# Altium PCB rfıd door lock.PcbDoc
Units mm, origin at the board's own origin, x right, y up, seen from the top; angles counter-clockwise.
Board outline 100 x 100 mm, 2 copper layers (Top Layer, Bottom Layer); 9 components, 16 nets, 59 pads, 4 vias.
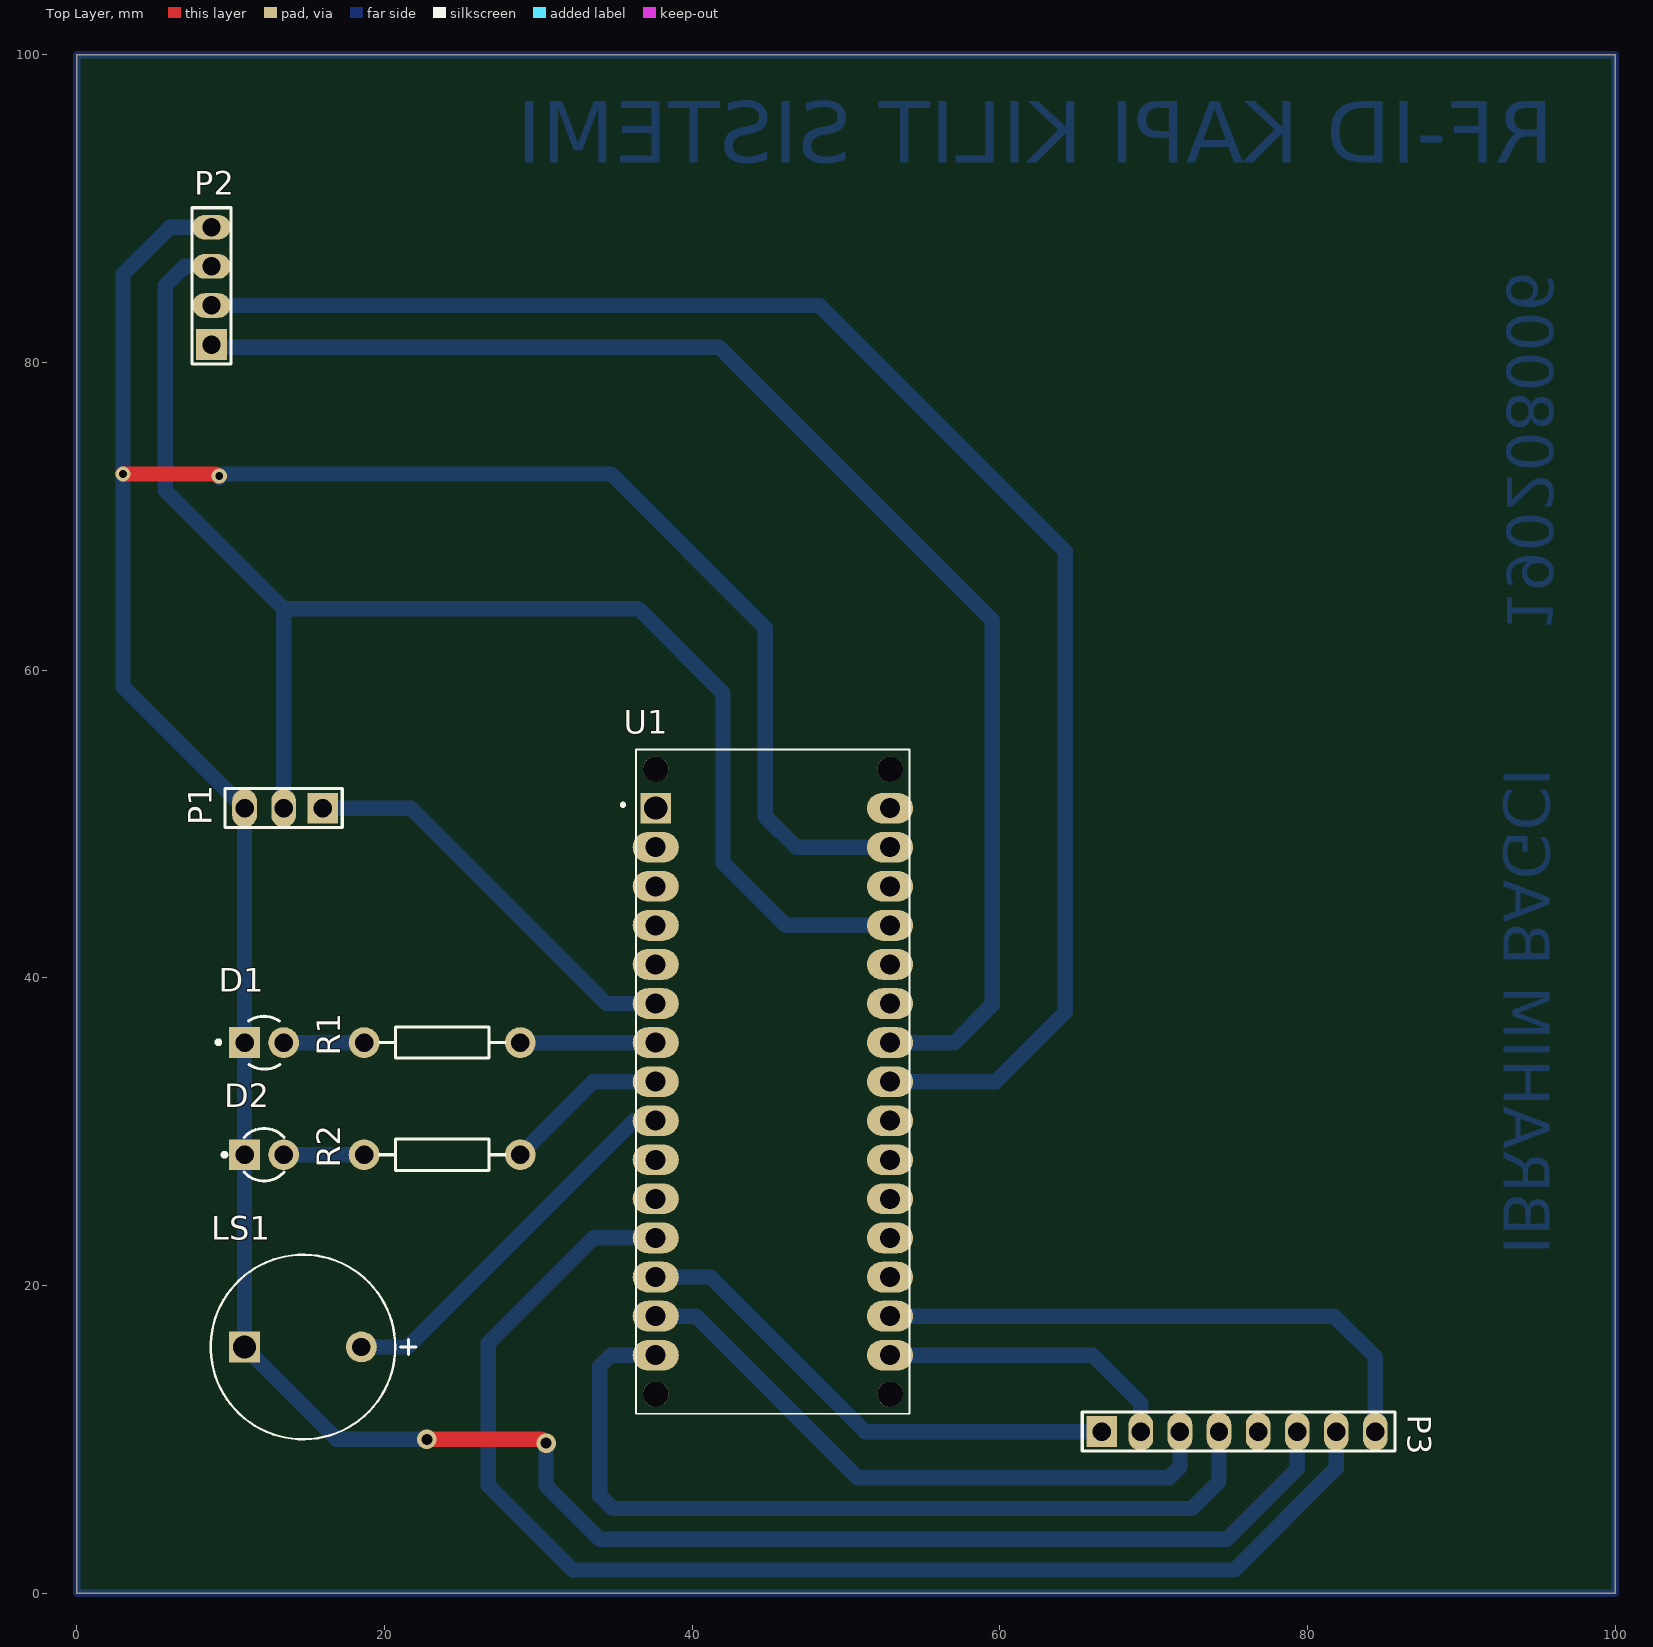
[diagram p0: Top Layer view]
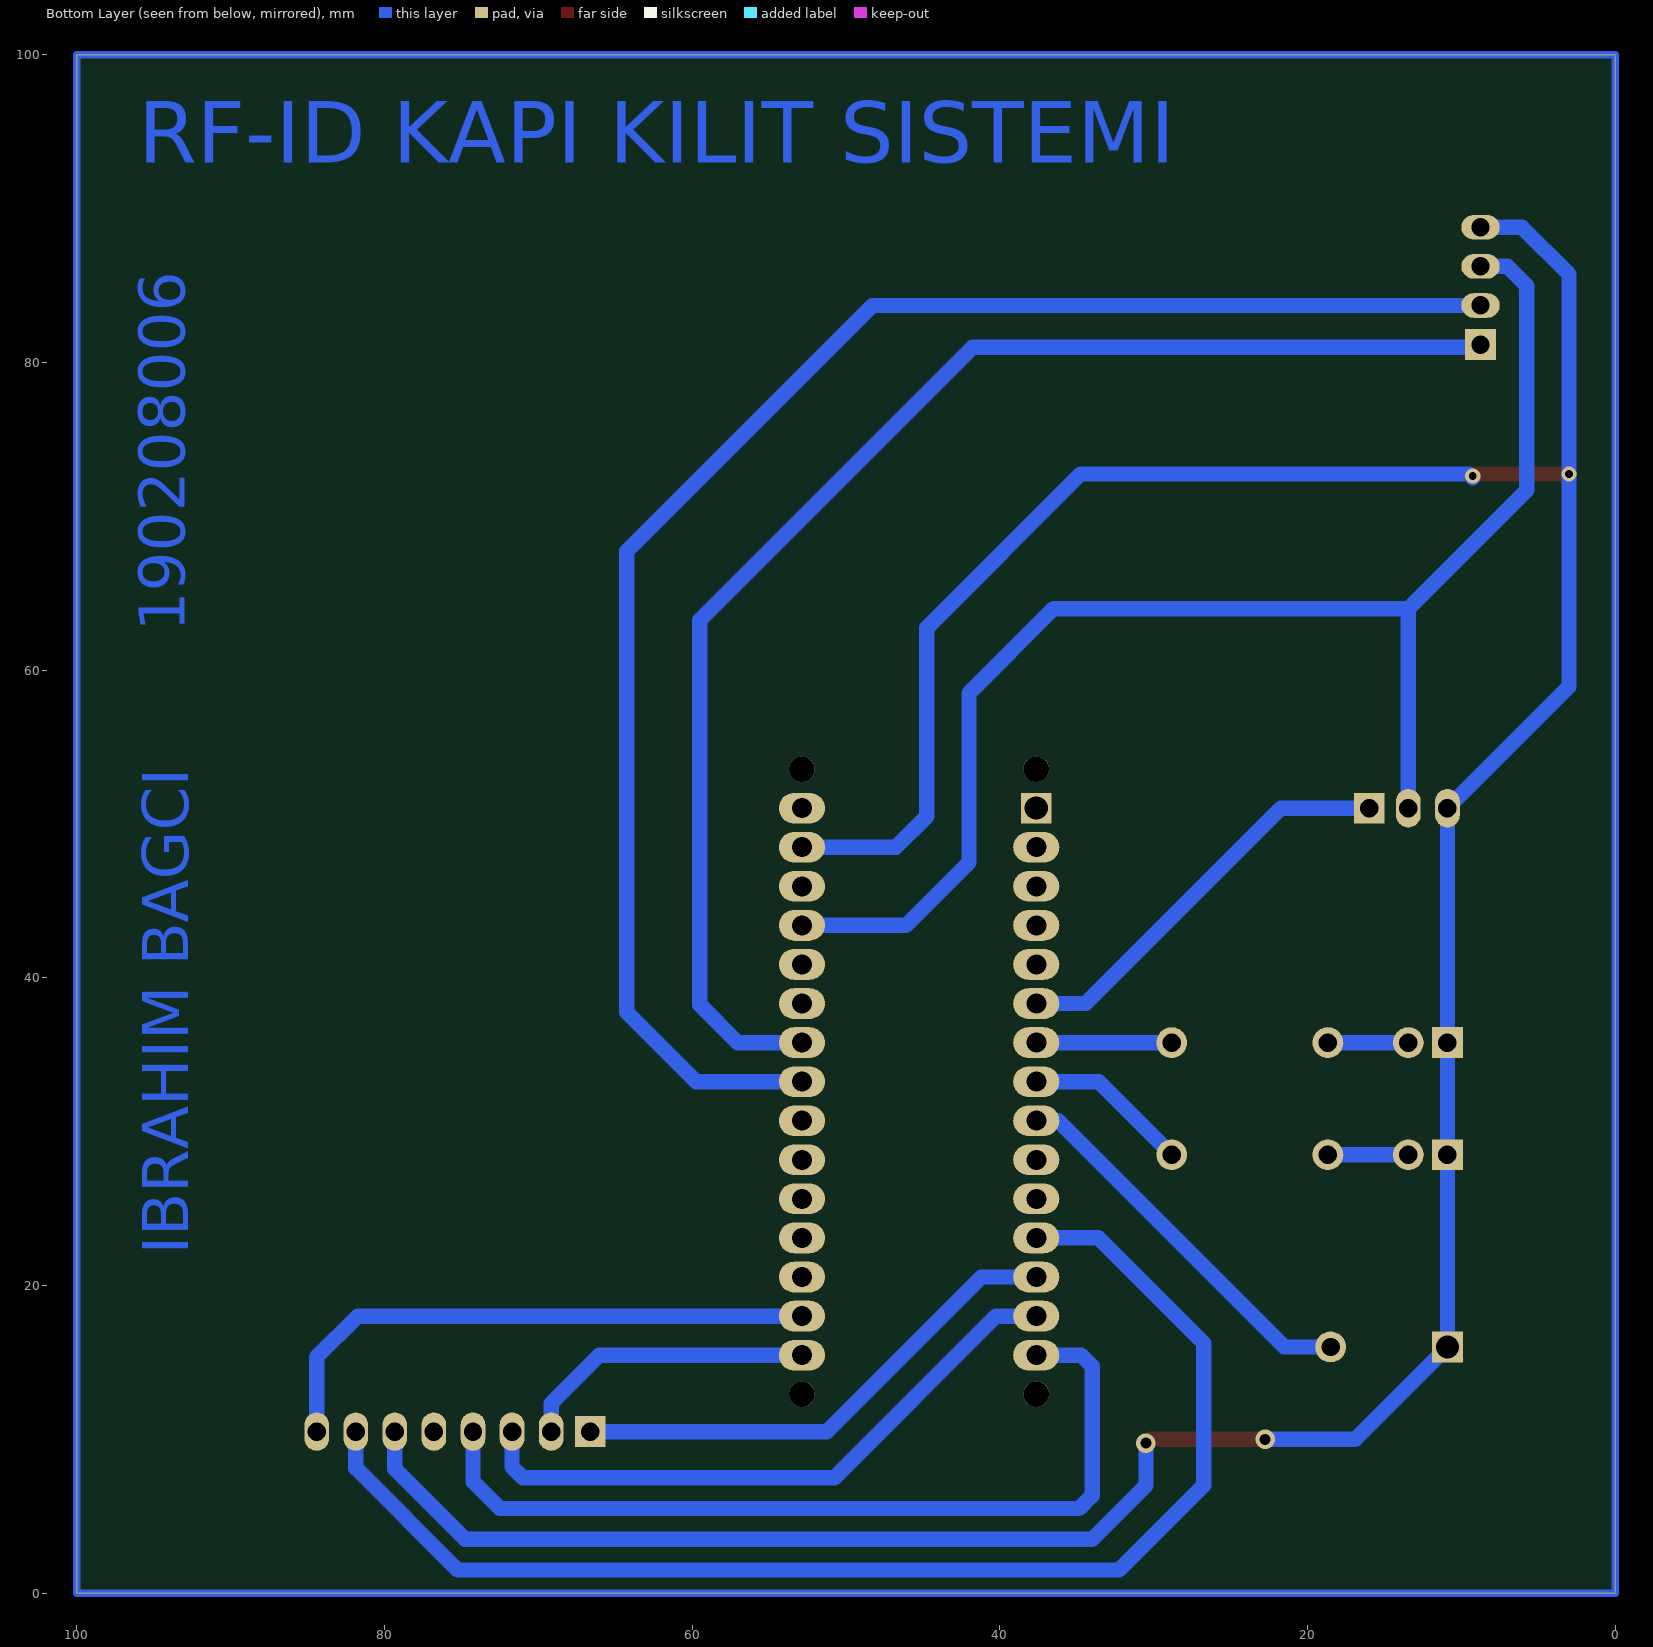
[diagram p1: Bottom Layer view, seen from below]

## Layer stack, top to bottom
Top Solder: solder mask 0.0102, Solder Resist, Dk 3.5
Top Layer: signal copper 0.0356
Dielectric 1: dielectric 0.32, FR-4, Dk 4.8
Bottom Layer: signal copper 0.0356
Bottom Solder: solder mask 0.0102, Solder Resist, Dk 3.5

## Board outline
0,0 100,0 100,100 0,100

## Design rules (kind name [scope] priority, off if disabled: settings)
Clearance [All] p1: gap=0.254 ignorepadtopadclearanceinfootprint=FALSE except(0: Arc-Hole Track-Hole SMDPad-Hole THPad-Hole Via-Hole Fill-Hole Poly-Hole Region-Hole Text-Hole)
PolygonConnect [All] p1: connectstyle=Relief reliefconductorwidth=0.254 reliefentries=4 polygonreliefangle="90 Angle" airgapwidth=0.254
RoutingVias [All] p1: holewidth=0.711 width=1.27 viastyle="Through Hole" minholewidth=0.711 minwidth=1.27 maxholewidth=0.711 maxwidth=1.27
SolderMaskExpansion [All] p1: expansion=0.102
Width [All] p1: maxlimit=1 minlimit=0.8 preferedwidth=1
30 further rules are at their usual default settings.

## Components (designator, comment, footprint, x,y, rotation, side; value= is the part's Value field where it differs from the comment)
D1 "GREEN LED" FP-HLMP-1503-MFG 12.17,35.79 r0 top
D2 "RED LED" FP-HLMP-1301-MFG 12.17,28.5 r0 top
LS1 "BUZZER" FP-MCKPX-G1203A-K4056-MFG 14.7,16 r0 top
P1 "SERVO" HDR1X3 15.98,51.03 r180 top
P2 "LCD" HDR1X4 8.75,81.17 r90 top
P3 "RC522" HDR1X8 66.63,10.5 r0 top
R1 "220R" AXIAL-0.4 23.75,35.79 r180 top value=1K
R2 "220R" AXIAL-0.4 23.75,28.5 r180 top value=1K
U1 "ARDUİNO NANO" MODULE_A000005 45.25,33.25 r0 top

## Footprints (in the part's own frame and the unit in brackets; to place one, negate y for a bottom-side part, rotate by r counter-clockwise, add the part's x,y. Pads: shape width x height; smd on the part's side, far side on the other; paste and mask are expansions set on the pad)
AXIAL-0.4 [mm] "Axial Device, Thru-Hole; 2 Leads; 0.4 in Pin Spacing"
  round 2 hole 1.2: 1(-5.08,0) 2(5.08,0)
  silkscreen extent -4.06,-1.02 4.06,1.02
FP-HLMP-1301-MFG [mm]
  rect 2x2 hole 1.2 paste-1000 mask+0: 1(-1.27,0)
  round 2 hole 1.2 paste-1000 mask+0: 2(1.27,0)
  silkscreen extent -2.7,-1.71 1.3,1.71, body extent -2.22,-2.22 2.22,2.22, height 0.25
FP-HLMP-1503-MFG [mm]
  rect 2x2 hole 1.2 paste-1000 mask+0: 1(-1.27,0)
  round 2 hole 1.2 paste-1000 mask+0: 2(1.27,0)
  silkscreen extent -3.1,-1.73 1.02,1.71, body extent -2.42,-2.42 2.42,2.42, height 0.25
FP-MCKPX-G1203A-K4056-MFG [mm]
  rect 2x2 hole 1.5 paste-1000 mask+0: 1(-3.8,0)
  round 2 hole 1.2 paste-1000 mask+0: 2(3.8,0)
  silkscreen extent -6,-6 7.35,6, body extent -6.1,-6.1 6.1,6.1, height 0.25
HDR1X3 [mm] "Connector; Header; 3 Position"
  rect 2x2 hole 1.2: 1(0,0)
  oval 1.6x2.5 hole 1.2: 2(2.54,0) 3(5.08,0)
  silkscreen extent -1.27,-1.27 6.35,1.27
HDR1X4 [mm] "Connector; Header; 4 Position"
  rect 2x2 hole 1.2: 1(0,0)
  oval 1.6x2.5 hole 1.2: 2(2.54,0) 3(5.08,0) 4(7.62,0)
  silkscreen extent -1.27,-1.27 8.89,1.27
HDR1X8 [mm] "Connector; Header; 8 Position"
  rect 2x2 hole 1.2: 1(0,0)
  oval 1.6x2.5 hole 1.2: 2(2.54,0) 3(5.08,0) 4(7.62,0) 5(10.16,0) 6(12.7,0) 7(15.24,0) 8(17.78,0)
  silkscreen extent -1.27,-1.27 19.05,1.27
MODULE_A000005 [mm]
  rect 2x2 hole 1.5: 1(-7.62,17.78)
  oval 3x2 hole 1.3: 2(-7.62,15.24) 3(-7.62,12.7) 4(-7.62,10.16) 5(-7.62,7.62) 6(-7.62,5.08) 7(-7.62,2.54) 8(-7.62,0) 9(-7.62,-2.54) 10(-7.62,-5.08) 11(-7.62,-7.62) 12(-7.62,-10.16) 13(-7.62,-12.7) 14(-7.62,-15.24) 15(-7.62,-17.78) 16(7.62,-17.78) 17(7.62,-15.24) 18(7.62,-12.7) 19(7.62,-10.16) 20(7.62,-7.62) 21(7.62,-5.08) 22(7.62,-2.54) 23(7.62,0) 24(7.62,2.54) 25(7.62,5.08) 26(7.62,7.62) 27(7.62,10.16) 28(7.62,12.7) 29(7.62,15.24) 30(7.62,17.78)
  round 1.651 hole 1.651 unplated: ""(-7.62,-20.32) ""(-7.62,20.32) ""(7.62,-20.32) ""(7.62,20.32)
  silkscreen extent -9.85,-21.59 8.89,21.59

## Part data
D1: library part CMP-18399-000010-1, "LED GREEN DIFFUSED T-1 T/H", Colour=Green, Forward Current=10mA, Forward Voltage=2.1V, Manufacturer=Broadcom, Manufacturer Part Number=HLMP-1503, Max Junction Temp=+110°C, Reverse Voltage=5V, Temperature="-20°C to +100°C", Temperature Range High=+100°C, Temperature Range Low=-20°C, Automotive=No, Category=Diode, ComponentLink2Description=Datasheet, ComponentLink2URL=https://docs.broadcom.com/docs/AV02-1555EN, Device Class L1=Optoelectronics, Device Class L2=LEDs, Device Class L3=unset, Digikey Description="LED GREEN DIFFUSED T-1 T/H", Height=6.35mm, Lead Free=Yes, Led Orientation=Straight, Luminous Intensity=1mcd, Mouser Description="LED; Green; 1mcd; 0.115In.Dia.; T-1; 565nm; 25mA; 2.1V; 5V; GaP; -20degC; 100deg", Octopart=https://octopart.com/hlmp-1503-broadcom-71130371, Package=HLMP-1503, Peak Emmision Wavelength=565nm, RoHS=TRUE, Standoff Height=0.88mm, Viewing Angle=60°, Wavelength=569nm
D2: library part CMP-18399-000007-1, "LED RED DIFFUSED T-1 T/H", Colour=Red, Forward Current=10mA, Forward Voltage=1.9V, Manufacturer=Broadcom, Manufacturer Part Number=HLMP-1301, Max Junction Temp=+110°C, Package=0, Reverse Voltage=5V, Temperature="-40°C to +100°C", Temperature Range High=+100°C, Temperature Range Low=-40°C, Automotive=No, Category=Diode, ComponentLink2Description=Datasheet, ComponentLink2URL=https://docs.broadcom.com/docs/AV02-1555EN, Device Class L1=Optoelectronics, Device Class L2=LEDs, Device Class L3=unset, Digikey Description="LED RED DIFFUSED T-1 T/H", Lead Free=Yes, Led Orientation=Straight, Luminous Intensity=3.4mcd, Mouser Description="Standard LEDs - Through Hole Red Diffused 635nm 3.4mcd", Octopart=https://octopart.com/hlmp-1301-broadcom-71130345, Peak Emmision Wavelength=635nm, RoHS=TRUE, Viewing Angle=60°, Wavelength=626nm
LS1: library part CMP-12433-000001-1, "MAGNETIC BUZZER AND TRANSDUCER - More Details", Current=30mA, Frequency=2300Hz, Manufacturer="Multicomp Pro", Manufacturer Part Number=MCKPX-G1203A-K4056, Max Supply Voltage=5V, Min Supply Voltage=2V, Operating Supply Voltage=3V, Package=0, Temperature="-20°C to +70°C", Temperature Range High=+70°C, Temperature Range Low=-20°C, Automotive=No, Category=Speak, ComponentLink2Description=Datasheet, ComponentLink2URL=http://www.farnell.com/datasheets/1498149.pdf?_ga=2.17855225.1157923166.1572356775-536200964.1569240579, Device Class L1=Electromechanical, Device Class L2="Audio Products", Device Class L3=Buzzers, Height=9.5mm, Lead Free=Yes, Octopart=https://octopart.com/mckpx-g1203a-k4056-multicomp-12157154, RoHS=TRUE, Standoff Height=0.5mm
P1: library part "Header 3", "Header, 3-Pin", LatestRevisionDate=17-Jul-2002, LatestRevisionNote="Re-released for DXP Platform.", Publisher="Altium Limited"
P2: library part "Header 4", "Header, 4-Pin", LatestRevisionDate=17-Jul-2002, LatestRevisionNote="Re-released for DXP Platform.", Publisher="Altium Limited"
P3: library part "Header 8", "Header, 8-Pin", LatestRevisionDate=17-Jul-2002, LatestRevisionNote="Re-released for DXP Platform.", Publisher="Altium Limited"
R1 R2: library part Res2, "Resistor", LatestRevisionDate=17-Jul-2002, LatestRevisionNote="Re-released for DXP Platform.", PackageDescription="Axial Device, Thru-Hole; 2 Leads; 0.4 in Pin Spacing", PackageReference=AXIAL-0.4, Published=8-Jun-2000, Publisher="Altium Limited"
U1: library part A000005, "CLOCK SAW OSCILLATOR SEAM7050 T&", Package=None, Availability=Unavailable, MP=A000005, Price=None

## Via types
v1: diameter 1.27, hole 0.711, Top Layer to Bottom Layer, 2 vias
v2: diameter 1, hole 0.5, Top Layer to Bottom Layer, 2 vias

## Nets (pads, with @x,y where several pads share a name; then routed paths per layer and width w, separated by ;. In a path a pad name is that pad's centre, name@x,y a point inside that pad or via, vN(x,y) a via of type N, cw(c..) or ccw(c..) an arc to the next point about the centre after c; other vN are vias at no path point)
NetD1_1: D1.1 D2.1 LS1.1 P1.3 P2.4 P3.6 U1.29 | length 226.8
  Top Layer w1: v2(3,72.75) 9.052,72.75 9.177,72.625 v2(9.25,72.625) ; v1(22.75,10) 30.177,10 30.427,9.75 v1(30.5,9.75)
  Bottom Layer w1: P2.4 6.04,88.79 3,85.75 v2(3,72.75) 3,58.93 P1.3 D1.1 D2.1 LS1.1 16.9,10 v1(22.75,10) ; v2@9.25,72.5 9.5,72.75 34.75,72.75 44.75,62.75 44.75,50.5 46.75,48.5 52.86,48.5 U1.29 ; v1(30.5,9.75) 30.5,7 34,3.5 74.75,3.5 79.33,8.08 P3.6
NetD1_2: D1.2 R1.2 | length 5.2
  Bottom Layer w1: D1.2 R1.2
NetD2_2: D2.2 R2.2 | length 5.2
  Bottom Layer w1: D2.2 R2.2
NetLS1_2: LS1.2 U1.9 | length 25.2
  Bottom Layer w1: LS1.2 21.5,16 36.21,30.71 U1.9
NetP1_1: P1.1 U1.6 | length 26.9
  Bottom Layer w1: P1.1 21.72,51.03 34.42,38.33 U1.6
NetP1_2: P1.2 P2.3 U1.27 | length 95.1
  Bottom Layer w1: P2.3 7,86.25 5.75,85 5.75,71.69 13.44,64 ; P1.2 13.44,64 ; U1.27 46.09,43.41 42,47.5 42,58.5 36.5,64 13.44,64
NetP2_1: P2.1 U1.24 | length 90.8
  Bottom Layer w1: P2.1 8.92,81 41.75,81 59.5,63.25 59.5,38.25 57.04,35.79 U1.24
NetP2_2: P2.2 U1.23 | length 105.4
  Bottom Layer w1: P2.2 48.29,83.71 64.25,67.75 64.25,37.75 59.75,33.25 U1.23
NetP3_1: P3.1 U1.13 | length 33.2
  Bottom Layer w1: U1.13 41.2,20.55 51.25,10.5 P3.1
NetP3_2: P3.2 U1.16 | length 19.4
  Bottom Layer w1: U1.16 66.03,15.47 69.17,12.33 P3.2
NetP3_3: P3.3 U1.14 | length 41
  Bottom Layer w1: U1.14 40.24,18.01 50.75,7.5 71,7.5 71.71,8.21 P3.3
NetP3_4: P3.4 U1.15 | length 56.9
  Bottom Layer w1: U1.15 34.72,15.47 34,14.75 34,6.336 34.836,5.5 72.5,5.5 74.25,7.25 P3.4
NetP3_7: P3.7 U1.12 | length 85.5
  Bottom Layer w1: U1.12 33.59,23.09 26.75,16.25 26.75,7 32.25,1.5 75.25,1.5 81.87,8.12 P3.7
NetP3_8: P3.8 U1.17 | length 37.5
  Bottom Layer w1: U1.17 81.74,18.01 84.41,15.34 P3.8
NetR1_1: R1.1 U1.7 | length 8.8
  Bottom Layer w1: R1.1 U1.7
NetR2_1: R2.1 U1.8 | length 10.8
  Bottom Layer w1: R2.1 33.58,33.25 U1.8
pads on no net: P3.5 U1. U1.1 U1.2 U1.3 U1.4 U1.5 U1.10 U1.11 U1.18 U1.19 U1.20 U1.21 U1.22 U1.25 U1.26 U1.28 U1.30
copper on no net: | length 400
  Bottom Layer w0.5: 0,0 0,100 100,100 100,0 0,0

## Other copper
Bottom Layer:
  text "RF-ID KAPI KILIT SISTEMI" at 96,93 h4
  text "190208006" at 93,62.5 h3 r270
  text "IBRAHIM BAGCI" at 92.75,22 h3 r270